# Altium PCB PSU.PcbDoc
Units mm, origin at the board's own origin, x right, y up, seen from the top; angles counter-clockwise.
Board outline 100 x 64 mm, 2 copper layers (Top Layer, Bottom Layer); 16 components, 10 nets, 49 pads, 13 vias.
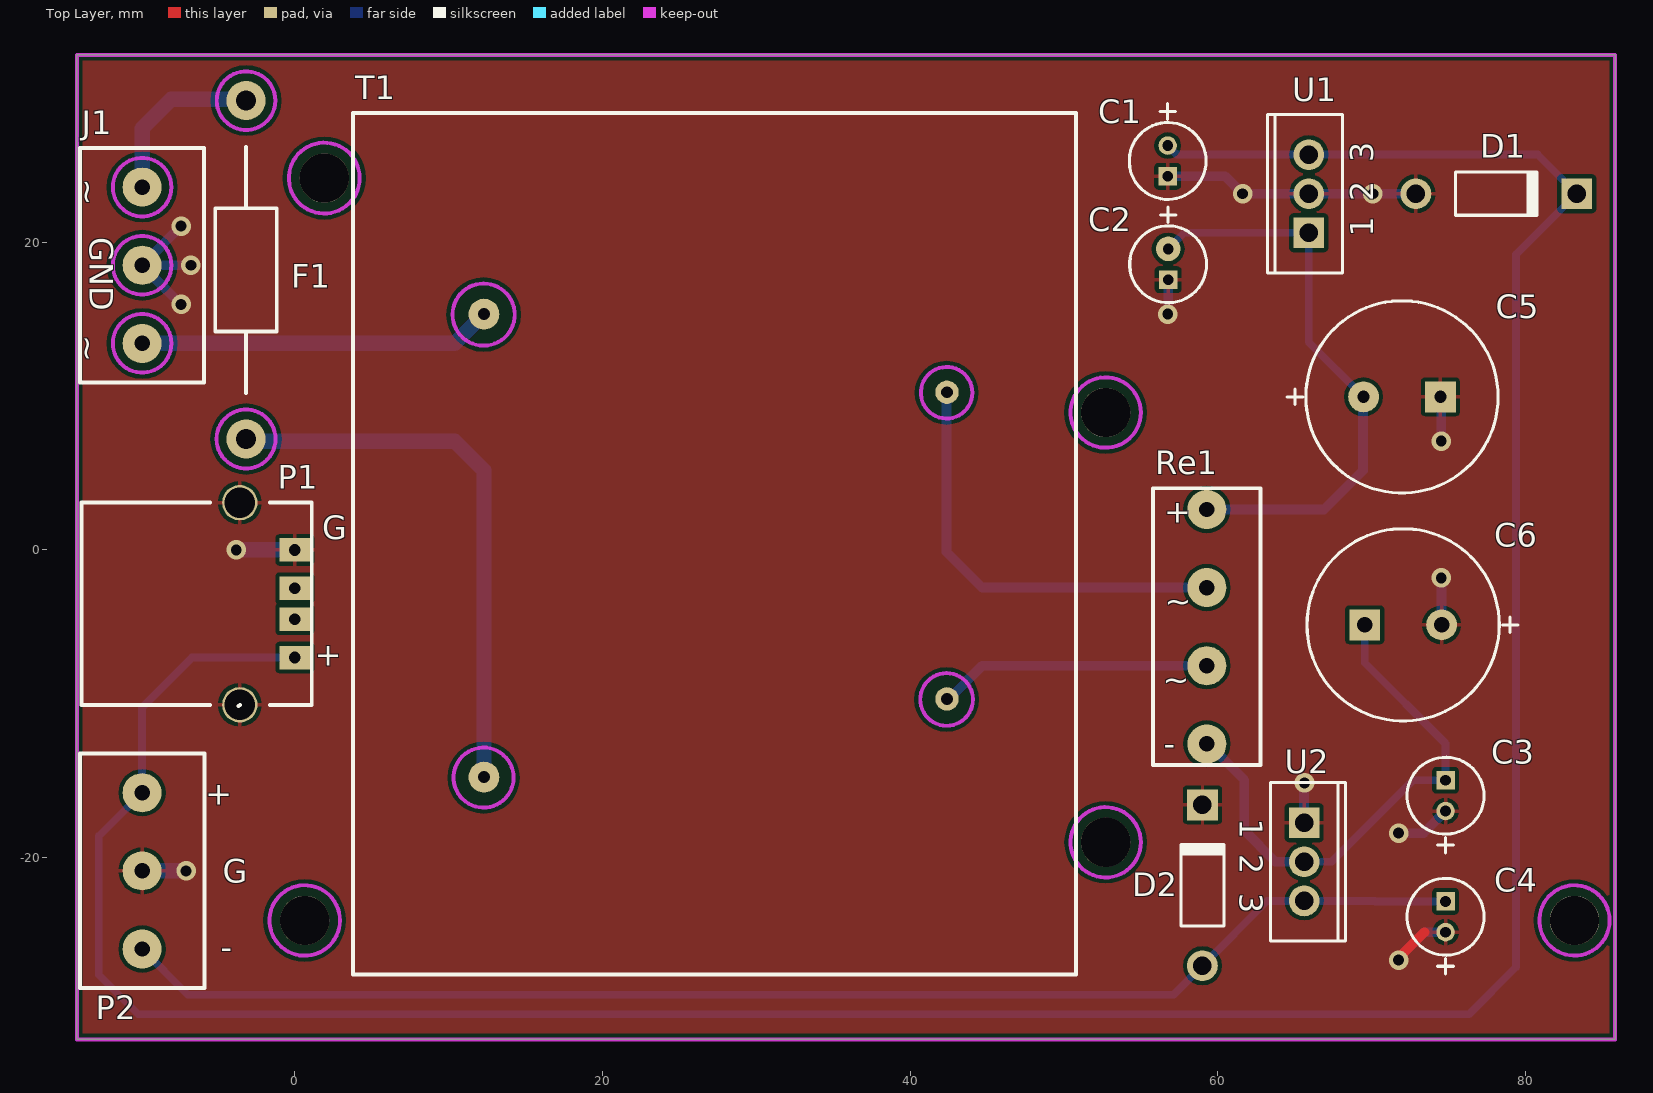
[diagram p0: Top Layer view]
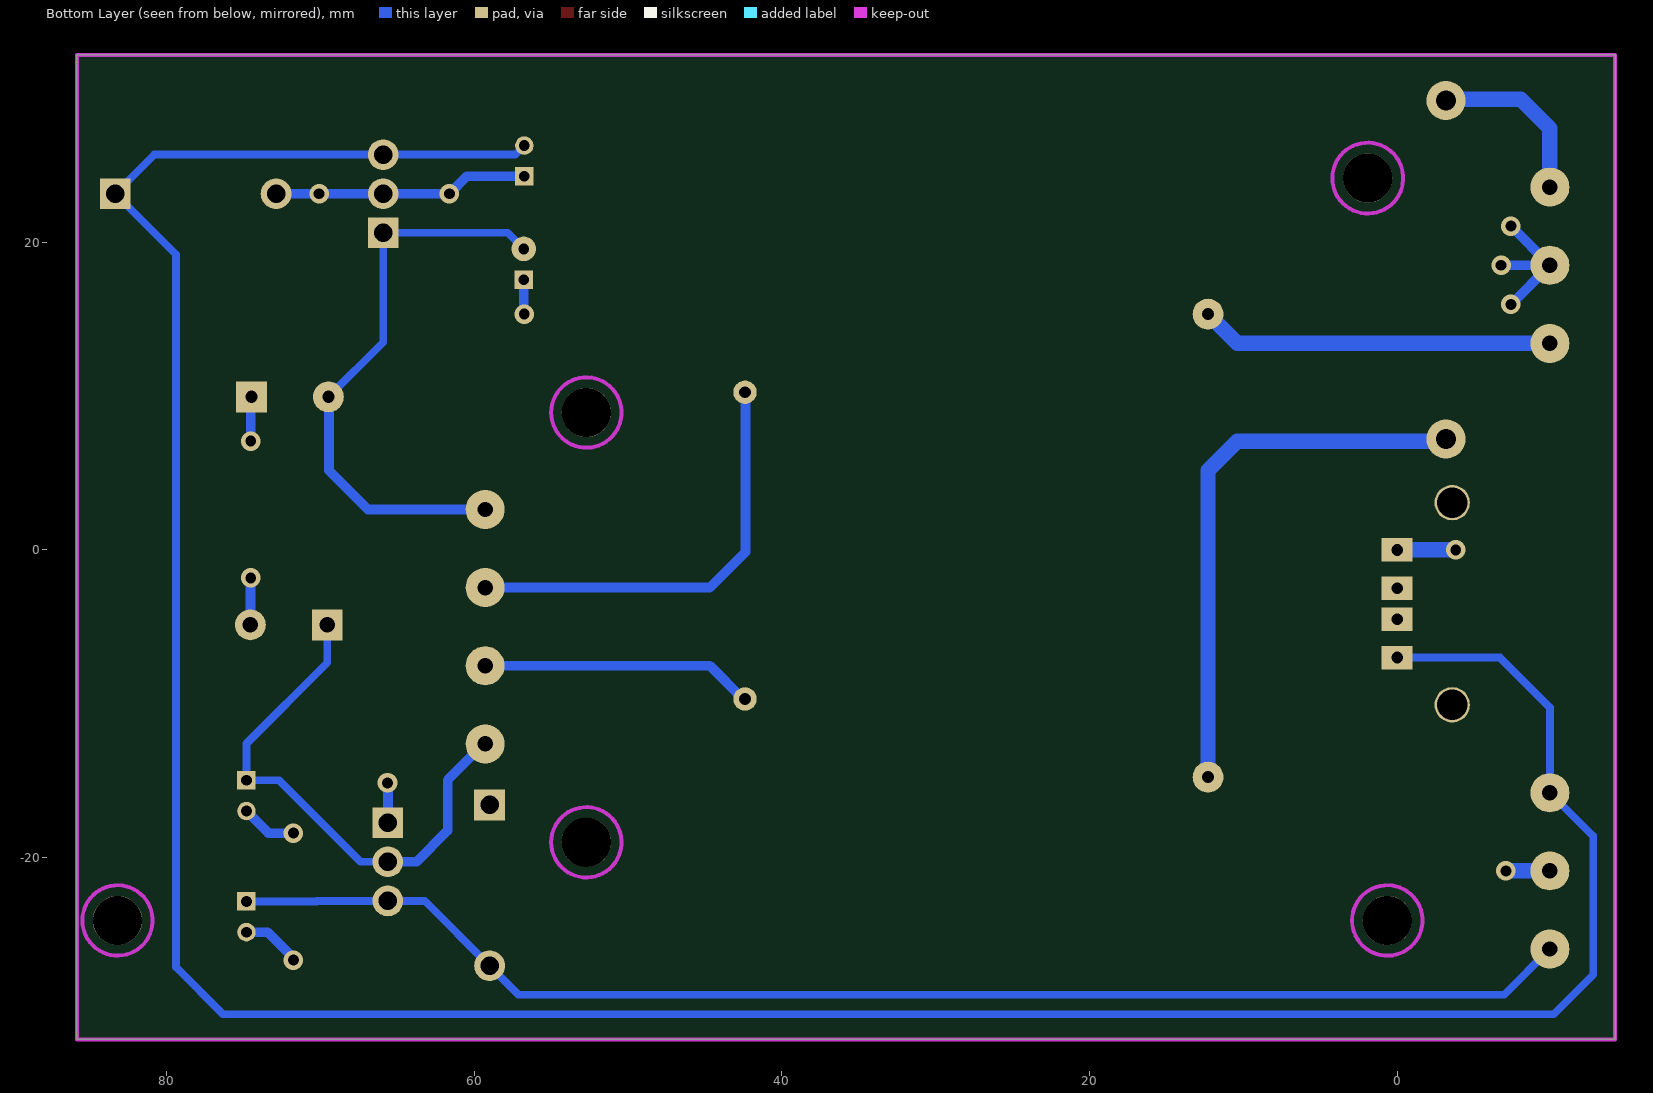
[diagram p1: Bottom Layer view, seen from below]

## Layer stack, top to bottom
Top Solder: solder mask 0.0102, Solder Resist, Dk 3.5
Top Layer: signal copper 0.0356
Dielectric 1: dielectric 0.32, FR-4, Dk 4.8
Bottom Layer: signal copper 0.0356
Bottom Solder: solder mask 0.0102, Solder Resist, Dk 3.5

## Board outline
-14.171,-31.818 -14.171,32.182 85.829,32.182 85.829,-31.818

## Design rules (kind name [scope] priority, off if disabled: settings)
Clearance Polygon_ANT [(InNamedPolygon('Top_Layer-GND')) or (InNamedPolygon('Bottom_Layer-GND')) vs InNet('RF')] p1: gap=0.127 ignorepadtopadclearanceinfootprint=FALSE except(0: Arc-Hole Track-Hole SMDPad-Hole THPad-Hole Via-Hole Fill-Hole Poly-Hole Region-Hole Text-Hole)
Clearance Polygon [(InNamedPolygon('Top_Layer-GND')) or (InNamedPolygon('Bottom_Layer-GND'))] p2: gap=0.254 ignorepadtopadclearanceinfootprint=FALSE except(0: Arc-Hole Track-Hole SMDPad-Hole THPad-Hole Via-Hole Fill-Hole Poly-Hole Region-Hole Text-Hole)
Clearance [All] p3: gap=0.152 ignorepadtopadclearanceinfootprint=FALSE except(0: Arc-Hole Track-Hole SMDPad-Hole THPad-Hole Via-Hole Fill-Hole Poly-Hole Region-Hole Text-Hole)
ComponentClearance [All] p1 off: gap=0.254 collisioncheckmode=3 verticalgap=0.254 showdistances=FALSE
FabricationTestPointUsage TestPointUsage [All] p1: valid=0 allowmultiple=FALSE
FabricationTestpoint Testpoint [All] p1: side=3 testpointundercomponent=TRUE minsize=1.016 maxsize=2.54 preferedsize=1.524 minholesize=0 maxholesize=1.016 preferedholesize=0.813 testpointgrid=0.025 allowsidetop=TRUE allowsidebottom=TRUE usegrid=TRUE gridtolerance=0
Height [All] p1 off: minheight=0 maxheight=25.4 prefheight=12.7
HoleSize [All] p1: absolutevalues=TRUE maxlimit=4.064 minlimit=0.305 maxpercent=80.000 minpercent=20.000
MinimumAnnularRing [All] p1 off: minimumring=0.152
PolygonConnect PolygonConnect_1 [isVia and innet(gnd)] p1: connectstyle=Direct reliefconductorwidth=0.254 reliefentries=4 polygonreliefangle="90 Angle" airgapwidth=0.254
PolygonConnect [All] p2: connectstyle=Relief reliefconductorwidth=0.254 reliefentries=4 polygonreliefangle="90 Angle" airgapwidth=0.254
RoutingVias [All] p1: holewidth=0.406 width=0.813 viastyle="Through Hole" minholewidth=0.254 minwidth=0.254 maxholewidth=0.711 maxwidth=1.27
SilkToSolderMaskClearance SilkscreenOverComponentPads [IsPad] p1: minsilkscreentomaskgap=0.254 clearancetoexposedcopper=TRUE
SolderMaskExpansion [All] p1: expansion=0.076
Width [All] p1: maxlimit=2.54 minlimit=0.15 preferedwidth=0.152
24 further rules are at their usual default settings.

## Components (designator, comment, footprint, x,y, rotation, side; value= is the part's Value field where it differs from the comment)
C1 "Cap2" "Cap Jamicon 1uF" 56.742,26.285 r270 top value=0.1uF
C2 "Cap2" "Cap Jamicon 330nF" 56.773,19.568 r270 top value=0.33uF
C3 "Cap2" "Cap Panasonic 2.2uF" 74.807,-16.976 r90 top value=2.2uF
C4 "Cap2" "Cap Jamicon 1uF" 74.807,-24.85 r90 top value=1uF
C5 "" "Cap 1000uF"#1 69.473,9.948 r0 top value=1000uF
C6 "" "Cap 1000uF"#2 74.548,-4.873 r180 top value=1000uF
D1 "Diode 1N4001" DO-41 78.109,23.156 r0 top
D2 "Diode 1N4001" DO-41 59.003,-21.805 r90 top
F1 "Fuse 1" "Fuse 22mm" -3.175,29.21 r270 top
J1 "Plug AC Female" "Power input PSU" -9.93,23.585 r270 top
P1 "USB out" "USB out" 0,0 r270 top
P2 "PSU filter connector" "PSU filter connector" -9.93,-20.865 r270 top
Re1 "Rectifier" "Rectifier PSU" 59.285,-12.61 r90 top
T1 "Transformer" Transformator 12.295,-14.769 r0 top
U1 "MC7805CT" 221A-06 65.917,23.156 r90 top
U2 "MC7905CT" 221A-09 65.612,-20.278 r270 top

## Footprints (in the part's own frame and the unit in brackets; to place one, negate y for a bottom-side part, rotate by r counter-clockwise, add the part's x,y. Pads: shape width x height; smd on the part's side, far side on the other; paste and mask are expansions set on the pad)
221A-06 [mm] "TO, Thru-Hole, Vertical, Heatsink Mounted; 3 In-Line Leads; Pitch 2.54 mm"
  rect 2x2 hole 1.2: 1(-2.54,0)
  round 2 hole 1.2: 2(0,0) 3(2.54,0)
  silkscreen extent -5.15,-2.2 5.15,2.7
221A-09 [mm] "TO, Thru-Hole, Vertical, Heatsink Mounted; 3 In-Line Leads; Pitch 2.54 mm"
  rect 2x2 hole 1.2: 1(-2.54,0)
  round 2 hole 1.2: 2(0,0) 3(2.54,0)
  silkscreen extent -5.15,-2.2 5.15,2.7
"Cap 1000uF"#1 [mm]
  round 2 hole 0.8: 1(0,0)
  rect 2x2 hole 0.8: 2(5,0)
  silkscreen extent -4.97,-6.25 8.75,6.25
"Cap 1000uF"#2 [mm]
  round 2 hole 1: 1(0,0)
  rect 2x2 hole 1: 2(5,0)
  silkscreen extent -4.97,-6.25 8.75,6.25
"Cap Jamicon 1uF" [mm]
  round 1.2 hole 0.7: 1(0,0)
  rect 1.2x1.2 hole 0.7: 2(2,0)
  silkscreen extent -2.72,-2.5 3.5,2.5
"Cap Jamicon 330nF" [mm]
  round 1.6 hole 0.7: 1(0,0)
  rect 1.2x1.2 hole 0.7: 2(2,0)
  silkscreen extent -2.72,-2.5 3.5,2.5
"Cap Panasonic 2.2uF" [mm]
  round 1.2 hole 0.7: 1(0,0)
  rect 1.2x1.2 hole 0.7: 2(2,0)
  silkscreen extent -2.72,-2.5 3.5,2.5
DO-41 [mm] "Diode, Axial; Body 5.2 x 2.7 mm (LxDia. max), Lead Dia. 0.86 mm (max)"
  round 2 hole 1.2: 1(-5.23,0)
  rect 2x2 hole 1.2: 2(5.23,0)
  silkscreen extent -2.65,-1.4 2.75,1.4
"Fuse 22mm" [mm]
  round 2.54 hole 1.3: 1(0,0) 2(22,0)
  silkscreen extent 3,-2 19,2
"Power input PSU" [mm]
  round 2.54 hole 1: 1(10.16,0) 2(0,0) 3(5.08,0)
  silkscreen extent -2.54,-4.03 12.7,4.03
"PSU filter connector" [mm]
  round 2.54 hole 1: 1(-5.08,0) 2(0,0) 3(5.08,0)
  silkscreen extent -7.62,-4.03 7.62,4.05
"Rectifier PSU" [mm] "Rectifier for Resonator PSU"
  round 2.54 hole 1: 1(15.24,0) 2(5.08,0) 3(0,0) 4(10.16,0)
  silkscreen extent -1.38,-3.5 16.62,3.5
Transformator [mil]
  round 78.74 hole 30: 1(0,0) 2(0,1185)
  round 60 hole 30: 3(1185,985) 4(1185,200)
  silkscreen extent -335,-505 1515,1700
"USB out" [mm]
  rect 1.524x2 hole 0.762: 1(7,0) 2(4.5,0) 3(2.5,0) 4(0,0)
  round 2.3 hole 2: 3(-3.07,-3.58) 5(10.07,-3.58)
  silkscreen extent -3.08,-13.86 10.15,1.1

## Part data
C1 C2 C3 C4: "Capacitor", PackageDescription="Capacitor; 2 Leads", PackageReference=CAPR5-4X5, Published=23-Sep-2002, Publisher="Altium Limited"
C5 C6: library part Cap2, "Cap", PackageDescription="Capacitor; 2 Leads", PackageReference=CAPR5-4X5, Published=23-Sep-2002, Publisher="Altium Limited"
D1 D2: "1 Amp General Purpose Rectifier", Code_JEDEC=DO-204-AL, ComponentLink1Description="Manufacturer Link", ComponentLink1URL=http://www.fairchildsemi.com/, ComponentLink2Description=Datasheet, ComponentLink2URL=http://www.fairchildsemi.com/ds/1N%2F1N4001.pdf, DatasheetVersion=1998, LatestRevisionDate=17-Jul-2002, LatestRevisionNote="Re-released for DXP Platform.", PackageDescription="Diode, Axial; Body 5.2 x 2.7 mm (LxDia. max), Lead Dia. 0.86 mm (max)", PackageReference=DO-41, PackageVersion=Aug-1999, Published=8-Jun-2000, Publisher="Altium Limited"
F1: "Fuse", LatestRevisionDate=17-Jul-2002, LatestRevisionNote="Re-released for DXP Platform.", PackageDescription="Thru-Hole; 2 Leads", PackageReference=PIN-W2/E2.8, Published=8-Jun-2000, Publisher="Altium Limited"
J1: "IEC Mains Power Outlet, EN60 320-2-2 F Class I, PC Flange Rear Mount, Chassis Socket", MaximumRating="10A, 250V a.c. (UL & CSA 15A, 250V a.c.)", PackageDocument="ver.80, 15-Sep-2003", ComponentLink1Description="Manufacturer Link", ComponentLink1URL=http://www.bulgin.co.uk/, DatasheetDocument="ver.80, 15-Sep-2003", DrillSize="Corresponds to nominal value.", LatestRevisionDate=15-Jul-2004, LatestRevisionNote="Component Replaced & renamed from \"Phonejack\".", MountingFixtures="Not drawn on schematic symbol.", PackageReference=PX0675/PC, PCB_Layout="Complies with manufacturer's recommendation.", Published=15-Jul-2004, Publisher="Altium Limited", Terminations="P.C. Spills"
Re1: library part "Bridge1 Resonator PSU", "Full Wave Diode Bridge", DatasheetVersion=E2732B, LatestRevisionDate=29-May-2009, LatestRevisionNote="Sch pins A & K swapped.", PackageDescription="Bridge Rectifier; 4 Terminals; Body 9.4 x 9.4 mm (typ); Pitch 5.08 mm", PackageReference=D-38, Published=8-Jun-2000, Publisher="Altium Limited"
U1: "Three-Terminal Positive Voltage Regulator", Code_JEDEC=TO-262-AA, ComponentLink1Description="Manufacturer Link", ComponentLink1URL=http://www.onsemi.com/site/products/taxonomy/0,4438,503,00.html, ComponentLink2Description=Datasheet, ComponentLink2URL=http://www.onsemi.com/pub/Collateral/MC7800-D.PDF, DatasheetVersion=1997, Note="Heatsink surface is connected to Pin 2", PackageDescription="TO, Thru-Hole, Vertical, Heatsink Mounted; 3 In-Line Leads; Pitch 2.54 mm", PackageReference=221A-06, PackageVersion=1997, Published=15-Apr-2002, Publisher="Altium Limited"
U2: "Three-Terminal Negative Voltage Regulator", Code_JEDEC=TO-262-AA, ComponentLink1Description="Manufacturer Link", ComponentLink1URL=http://www.onsemi.com/site/products/taxonomy/0,4438,503,00.html, ComponentLink2Description=Datasheet, ComponentLink2URL=http://www.onsemi.com/pub/Collateral/MC7900-D.PDF, DatasheetVersion=1996, Note="Heatsink surface connected to Pin 2", PackageDescription="TO, Thru-Hole, Vertical, Heatsink Mounted; 3 In-Line Leads; Pitch 2.54 mm", PackageReference=221A-09, Published=15-Apr-2002, Publisher="Altium Limited"

## Free pads (board coordinates)
  round 3.2 hole 3.2: 0(0.639,-24.088) 0(1.909,24.172) 0(52.709,-19.008) 0(52.709,8.932) 0(83.189,-24.088)

## Via types
v1: diameter 1.27, hole 0.711, Top Layer to Bottom Layer, tented both sides, 13 vias

## Nets (pads, with @x,y where several pads share a name; then routed paths per layer and width w, separated by ;. In a path a pad name is that pad's centre, name@x,y a point inside that pad or via, vN(x,y) a via of type N, cw(c..) or ccw(c..) an arc to the next point about the centre after c; other vN are vias at no path point)
"24V a": Re1.4 T1.3 | length 28.2
  Bottom Layer w0.635: T1.3@42.369,10.219 42.369,-0.139 44.68,-2.45 Re1.4
"24V b": Re1.2 T1.4 | length 17.8
  Bottom Layer w0.635: T1.4@42.369,-9.72 42.49,-9.72 44.68,-7.53 Re1.2
"230V a": F1.1 J1.2 | length 11.6
  Bottom Layer w1: J1.2 -9.93,27.395 -8.025,29.3 F1.1@-2.945,29.3
"230V a2": F1.2 T1.1 | length 36.1
  Bottom Layer w1: F1.2@-2.945,7.3 -2.72,7.075 10.39,7.075 12.295,5.17 T1.1
"230V b": J1.1 T1.2 | length 23
  Bottom Layer w1: J1.1 10.39,13.425 T1.2
"DC 5V": C1.1 D1.2 P1.1 P2.1 U1.3 | length 204.1
  Bottom Layer w0.508: P1.1 -6.687,-7 -9.93,-10.243 P2.1 -12.752,-18.607 -12.752,-27.619 -10.186,-30.184 76.331,-30.184 79.379,-27.136 79.379,19.196 D1.2 80.799,25.696 U1.3 57.332,25.696 C1.1
"DC 12V": C2.1 C5.1 Re1.1 U1.1 | length 37.7
  Bottom Layer w0.508: C2.1 57.821,20.616 U1.1 65.917,13.504 C5.1
  Bottom Layer w0.635: Re1.1 66.905,2.63 69.445,5.17 69.445,9.92 C5.1
"DC -5V": C4.2 D2.1 P2.3 U2.3 | length 88.5
  Bottom Layer w0.508: P2.3 -6.961,-28.914 57.124,-28.914 D2.1 63.22,-22.818 U2.3 70.21,-22.818 70.242,-22.85 C4.2
"DC -12V": C3.2 C6.2 Re1.3 U2.2 | length 34.9
  Bottom Layer w0.508: U2.2@65.663,-20.278 67.39,-20.278 72.692,-14.976 C3.2 74.807,-12.587 69.548,-7.328 C6.2
  Bottom Layer w0.635: Re1.3@59.415,-12.658 61.726,-14.97 61.726,-18.246 63.758,-20.278 U2.2
GND: C1.2 C2.2 C3.1 C4.1 C5.2 C6.1 D1.1 D2.2 J1.3 P1.3@-3.58,3.07 P1.4 P1.5 P2.2 U1.2 U2.1 | length 54.7
  Top Layer w0.635: v1(71.755,-26.67) 71.755,-26.526 73.43,-24.85 ; v1(71.755,-18.415) v1@71.895,-18.415 ; C5.2 C5.2@74.525,9.896 ; v1(74.525,-1.815) v1@74.548,-1.838
  Bottom Layer w0.635: v1(-7.39,15.965) J1.3 ; v1(-7.39,21.045) J1.3 ; v1(-6.755,18.505) J1.3 ; C1.2 60.49,24.285 v1(61.619,23.156) U1.2 v1(70.08,23.156) D1.1 ; v1@56.773,15.358 C2.2 ; U2.1 65.612,-15.173 v1(65.635,-15.15) ; v1(71.755,-26.67) 71.755,-26.526 73.43,-24.85 C4.1 ; v1(71.755,-18.415) 73.368,-18.415 C3.1 ; C5.2 74.525,9.896 v1(74.525,7.075) ; v1(74.525,-1.815) 74.548,-1.838 C6.1
  Bottom Layer w1: P2.2 v1(-7.075,-20.865) ; v1(-3.81,0) P1.4
  other v1: 56.745,15.33
pads on no net: P1.2 P1.3@0,-2.5

## Polygon pours and split planes (outlines as drawn)
GND on Top Layer "Top_Layer-GND" (solid, remove dead copper, pour order 4): -14.171,-31.818 -14.171,31.981 -13.97,32.182 85.829,32.182 85.829,-31.818

## Keep-outs
Top Layer:
  circle w0.254: c-3.175,7.21 r1.918
  circle w0.254: c-3.175,29.21 r1.905
  circle w0.254: c12.27,15.299 r2.022
  circle w0.254: c12.27,-14.8 r1.951
  circle w0.254: c-9.93,23.585 r1.905
  circle w0.254: c-9.93,18.505 r1.905
  circle w0.254: c-9.93,13.425 r1.905
  circle w0.254: c42.369,-9.72 r1.712
  circle w0.254: c42.369,10.219 r1.676
Keep-Out Layer:
  circle w0.254: c83.189,-24.088 r2.286
  circle w0.254: c1.909,24.172 r2.303
  circle w0.254: c0.639,-24.088 r2.291
  circle w0.254: c52.709,-19.008 r2.286
  circle w0.254: c52.709,8.932 r2.287
  lines w0.254: -14.171,-31.818 85.829,-31.818 85.829,32.182 -14.171,32.182 -14.171,-31.818

## Silkscreen, mask and mechanical layers (free items; w line width, h text height)
Mechanical 1:
  the board outline again, w0.254

## Text inside footprints (layer, text, board x,y; h text height)
J1: Top Overlay "~" at -14.171,13.97 h1.52 r270; Top Overlay "GND" at -13.335,20.32 h1.52 r270; Top Overlay "~" at -14.171,24.13 h1.52 r270
P1: Top Overlay "G" at 1.781,0.708 h1.52; Top Overlay "+" at 3.051,-6.277 h1.52 r180
P2: Top Overlay "-" at -4.065,-25.445 h1.52 r180; Top Overlay "G" at -4.7,-21.635 h1.52; Top Overlay "+" at -4.065,-15.285 h1.52 r180
Re1: Top Overlay "-" at 56.475,-13.36 h1.52; Top Overlay "~" at 56.405,-9.18 h1.52; Top Overlay "+" at 56.525,1.77 h1.52; Top Overlay "~" at 56.535,-4.07 h1.52
U1: Top Overlay "3" at 70.092,25.196 h1.5 r90; Top Overlay "2" at 70.092,22.656 h1.5 r90; Top Overlay "1" at 70.092,20.366 h1.5 r90
U2: Top Overlay "1" at 61.437,-17.488 h1.5 r270; Top Overlay "2" at 61.437,-19.778 h1.5 r270; Top Overlay "3" at 61.437,-22.318 h1.5 r270